# Altium PCB PCB1.PcbDoc
Units mil, origin at the board's own origin, x right, y up, seen from the top; angles counter-clockwise.
Board outline 1295 x 1795 mil, 2 copper layers (Top Layer, Bottom Layer); 3 components, 7 nets, 62 pads, 0 vias.
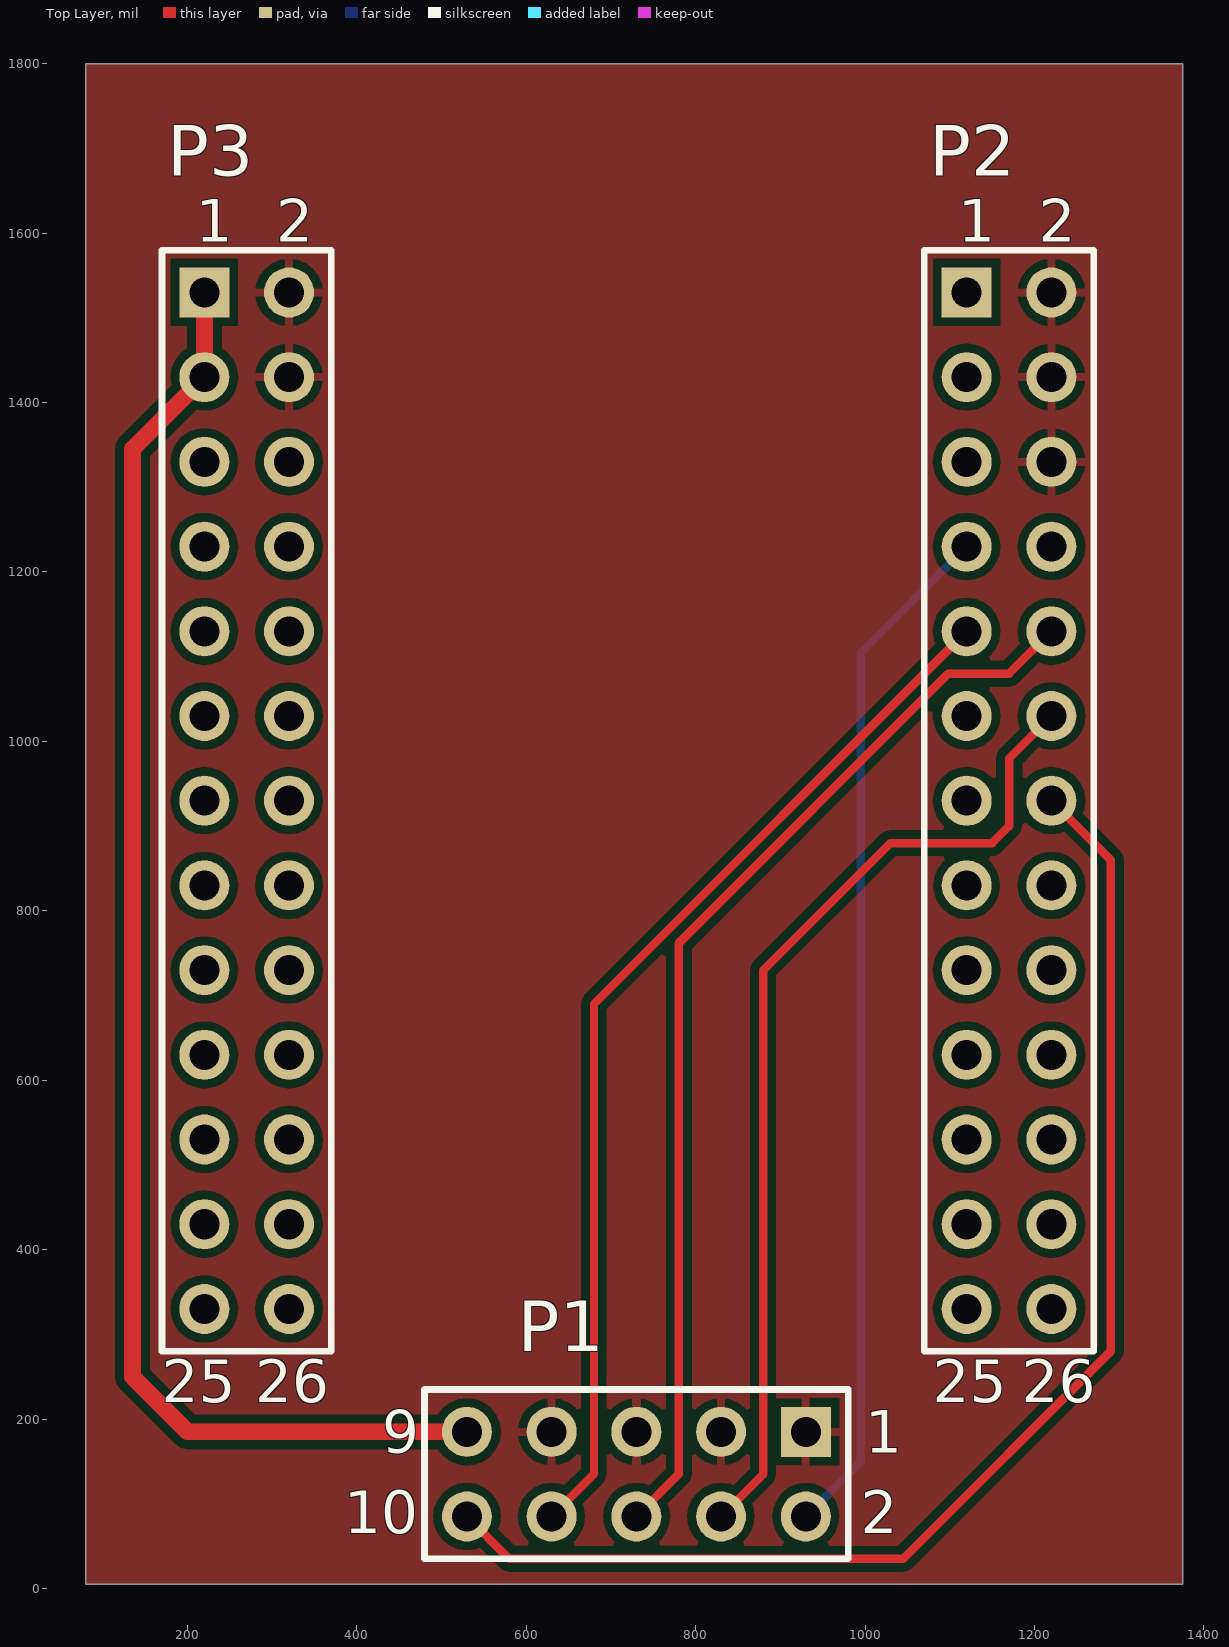
[diagram p0: Top Layer view]
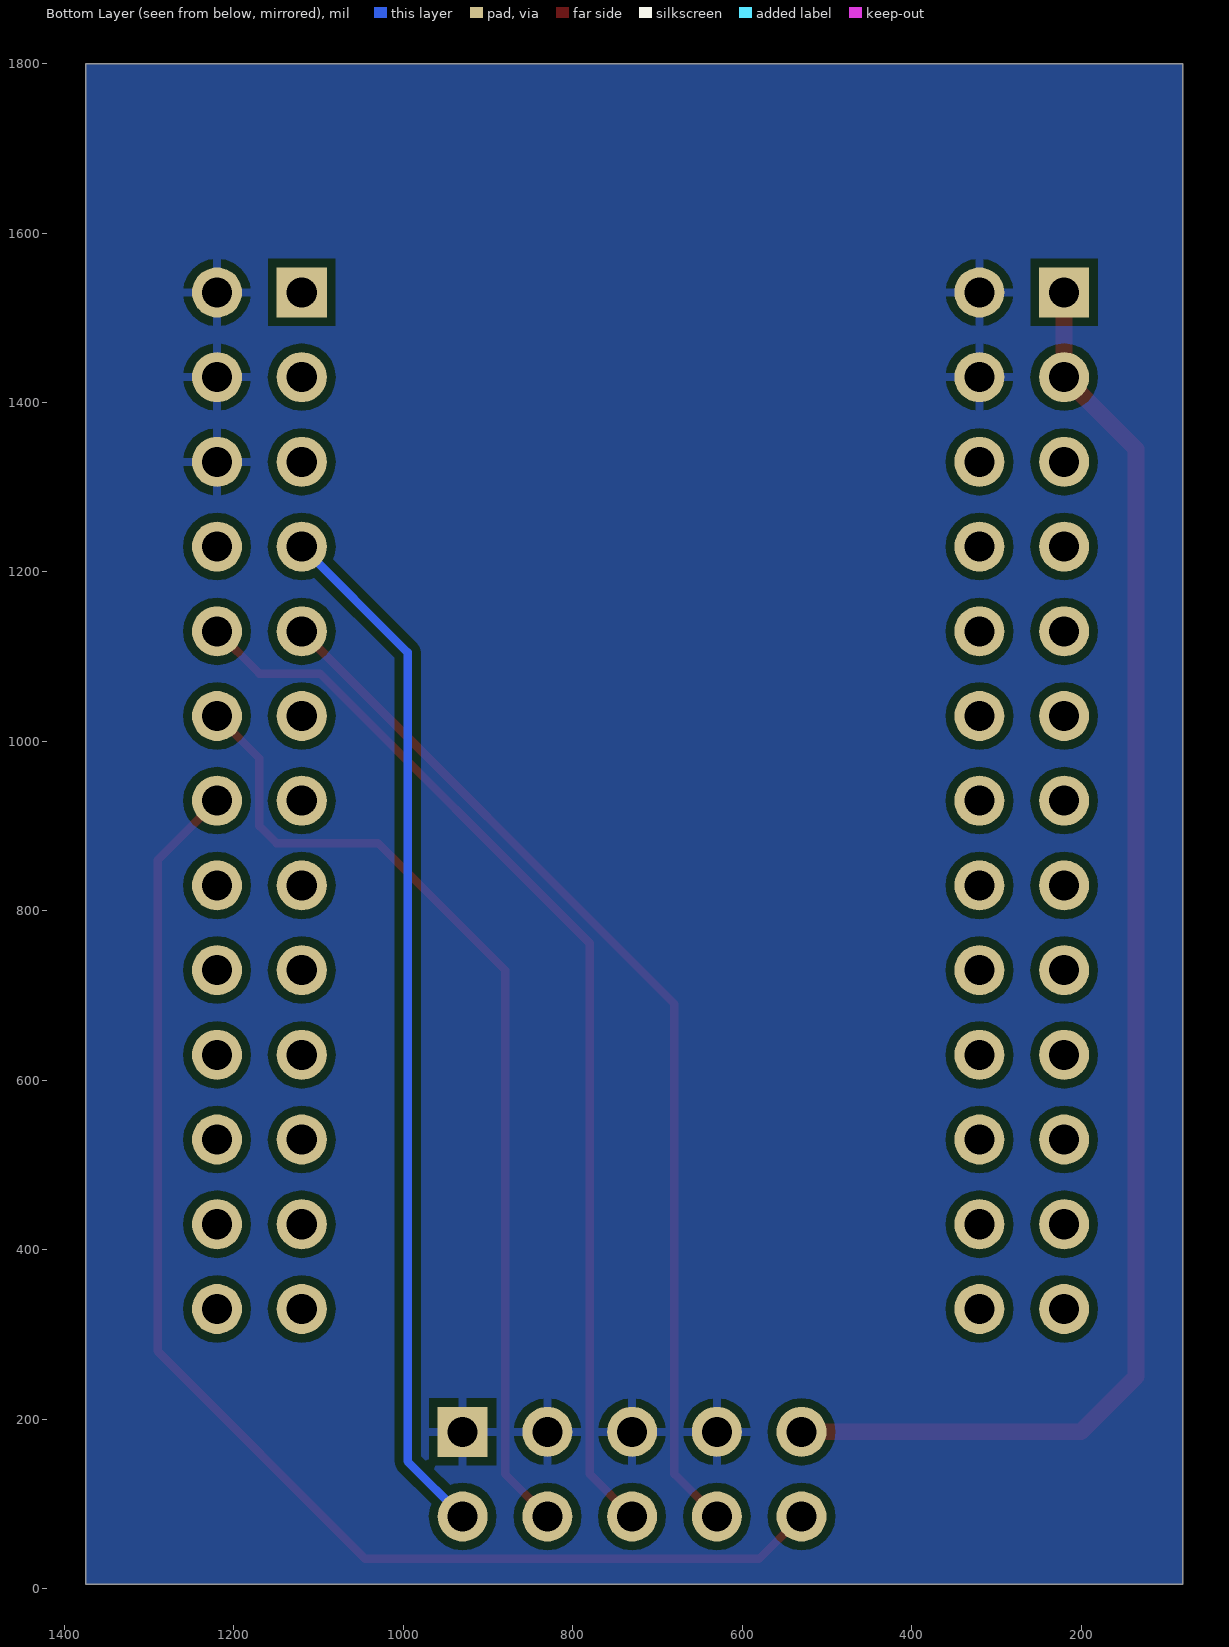
[diagram p1: Bottom Layer view, seen from below]

## Layer stack, top to bottom
Top Solder: solder mask 0.4, Solder Resist, Dk 3.5
Top Layer: signal copper 1.4
Dielectric 1: dielectric 12.6, FR-4, Dk 4.8
Bottom Layer: signal copper 1.4
Bottom Solder: solder mask 0.4, Solder Resist, Dk 3.5

## Board outline
80,5 1375,5 1375,1800 80,1800

## Design rules (kind name [scope] priority, off if disabled: settings)
Clearance [All] p1: gap=10 ignorepadtopadclearanceinfootprint=TRUE except(0: Arc-Hole Track-Hole SMDPad-Hole THPad-Hole Via-Hole Fill-Hole Poly-Hole Region-Hole Text-Hole)
PolygonConnect [All] p1: connectstyle=Relief reliefconductorwidth=10 reliefentries=4 polygonreliefangle="90 Angle" airgapwidth=10
RoutingVias [All] p1: holewidth=28 width=50 viastyle="Through Hole" minholewidth=28 minwidth=50 maxholewidth=28 maxwidth=50
SolderMaskExpansion [All] p1: expansion=4
Width [All] p1: maxlimit=30 minlimit=10 preferedwidth=10
30 further rules are at their usual default settings.

## Components (designator, comment, footprint, x,y, rotation, side; value= is the part's Value field where it differs from the comment)
P1 "Header 5X2" HDR2X5 930,185 r180 top
P2 "Header 13X2" HDR2X13 1120,1530 r270 top
P3 "Header 13X2" HDR2X13 220,1530 r270 top

## Footprints (in the part's own frame and the unit in brackets; to place one, negate y for a bottom-side part, rotate by r counter-clockwise, add the part's x,y. Pads: shape width x height; smd on the part's side, far side on the other; paste and mask are expansions set on the pad)
HDR2X5 [mm] "Connector; Header; 5x2 Position"
  rect 1.5x1.5 hole 0.9: 1(0,0)
  round 1.5 hole 0.9: 2(0,2.54) 3(2.54,0) 4(2.54,2.54) 5(5.08,0) 6(5.08,2.54) 7(7.62,0) 8(7.62,2.54) 9(10.16,0) 10(10.16,2.54)
  silkscreen extent -1.27,-1.27 11.43,3.81
HDR2X13 [mm] "Connector; Header; 13x2 Position"
  rect 1.5x1.5 hole 0.9: 1(0,0)
  round 1.5 hole 0.9: 2(0,2.54) 3(2.54,0) 4(2.54,2.54) 5(5.08,0) 6(5.08,2.54) 7(7.62,0) 8(7.62,2.54) 9(10.16,0) 10(10.16,2.54) 11(12.7,0) 12(12.7,2.54) 13(15.24,0) 14(15.24,2.54) 15(17.78,0) 16(17.78,2.54) 17(20.32,0) 18(20.32,2.54) 19(22.86,0) 20(22.86,2.54) 21(25.4,0) 22(25.4,2.54) 23(27.94,0) 24(27.94,2.54) 25(30.48,0) 26(30.48,2.54)
  silkscreen extent -1.27,-1.27 31.75,3.81

## Part data
P1: "Header, 5-Pin, Dual row", LatestRevisionDate=17-Jul-2002, LatestRevisionNote="Re-released for DXP Platform.", Publisher="Altium Limited"
P2 P3: "Header, 13-Pin, Dual row", LatestRevisionDate=17-Jul-2002, LatestRevisionNote="Re-released for DXP Platform.", Publisher="Altium Limited"

## Nets (pads, with @x,y where several pads share a name; then routed paths per layer and width w, separated by ;. In a path a pad name is that pad's centre, name@x,y a point inside that pad or via, vN(x,y) a via of type N, cw(c..) or ccw(c..) an arc to the next point about the centre after c; other vN are vias at no path point)
5V: P1.9 P3.1 P3.3 | length 1737.1
  Top Layer w20: P3.1 P3.3 135,1345 135,250 200,185 P1.9
AD0_TCK: P1.2 P2.7 | length 1223.7
  Bottom Layer w10: P1.2 995,150 995,1105 P2.7
AD1_TDO: P1.6 P2.10 | length 1290
  Top Layer w10: P1.6 780,135 780,761.72 1098.28,1080 1170,1080 P2.10
AD2_TDI: P1.8 P2.9 | length 1248
  Top Layer w10: P1.8 680,135 680,690 P2.9
AD3_TMS: P1.4 P2.12 | length 1176.8
  Top Layer w10: P1.4 880,135 880,730 1030,880 1150,880 1170,900 1170,980 P2.12
AD4_nTRST: P1.10 P2.14 | length 1561.2
  Top Layer w10: P1.10 580,35 1045,35 1290,280 1290,860 P2.14
GND: P1.1 P1.3 P1.5 P1.7 P2.2 P2.4 P2.6 P3.2 P3.4 | length 23
  Top Layer w10: P1.5@740,185 P1.5@740,207.97
pads on no net: P2.1 P2.3 P2.5 P2.8 P2.11 P2.13 P2.15 P2.16 P2.17 P2.18 P2.19 P2.20 P2.21 P2.22 P2.23 P2.24 P2.25 P2.26 P3.5 P3.6 P3.7 P3.8 P3.9 P3.10 P3.11 P3.12 P3.13 P3.14 P3.15 P3.16 P3.17 P3.18 P3.19 P3.20 P3.21 P3.22 P3.23 P3.24 P3.25 P3.26

## Polygon pours and split planes (outlines as drawn)
GND on Top Layer "GND_TOP" (solid, remove dead copper, pour order 0): 80,5 1375,5 1375,1800 80,1800
GND on Bottom Layer "GND_BOT" (solid, pour order 1): 80,5 1375,5 1375,1800 80,1800

## Text inside footprints (layer, text, board x,y; h text height)
P1: Top Overlay "10" at 385,65 h50; Top Overlay "9" at 430,160 h50; Top Overlay "1" at 1000,160 h50; Top Overlay "2" at 995,65 h50
P2: Top Overlay "2" at 1205,1590 h50; Top Overlay "1" at 1110,1590 h50; Top Overlay "25" at 1080,220 h50; Top Overlay "26" at 1185,220 h50
P3: Top Overlay "2" at 305,1590 h50; Top Overlay "1" at 210,1590 h50; Top Overlay "25" at 170,220 h50; Top Overlay "26" at 280,220 h50